# Altium PCB ESP_3_ERC.PcbDoc
Units mm, origin at the board's own origin, x right, y up, seen from the top; angles counter-clockwise.
Board outline 70 x 102 mm, 2 copper layers (Top Layer, Bottom Layer); 40 components, 42 nets, 143 pads, 0 vias.
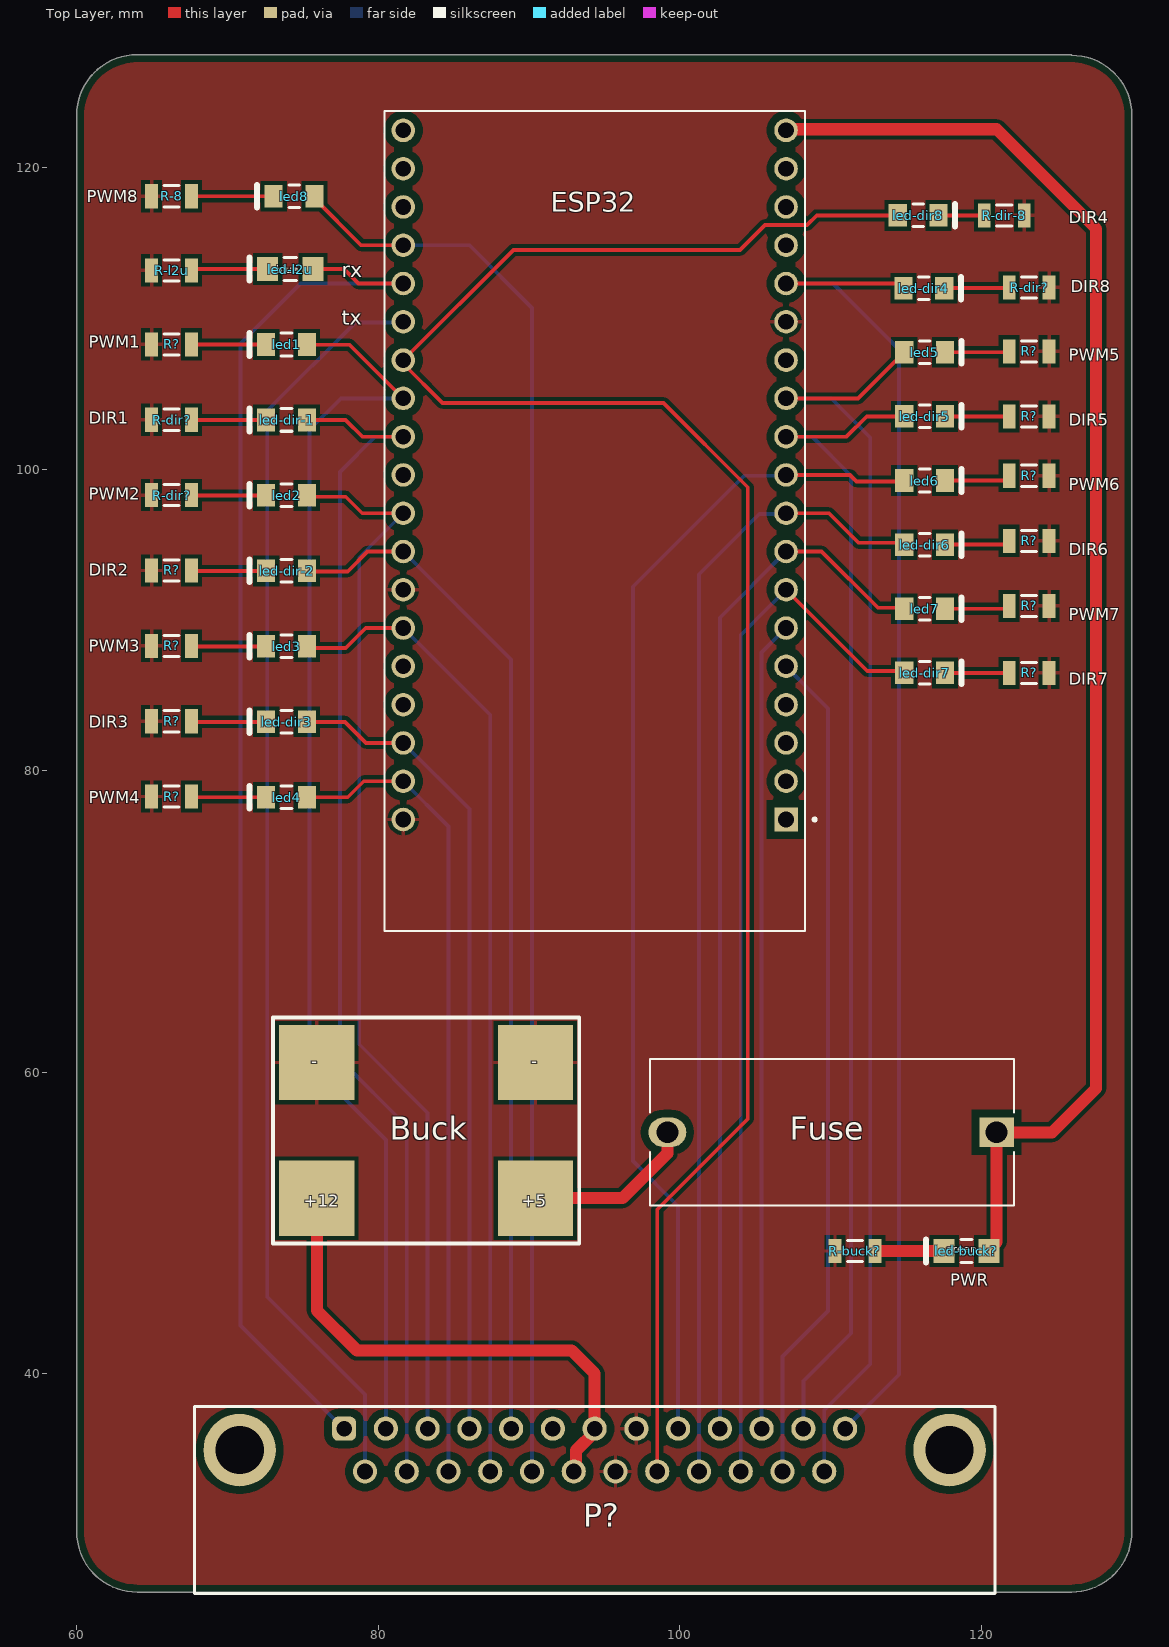
[diagram p0: Top Layer view]
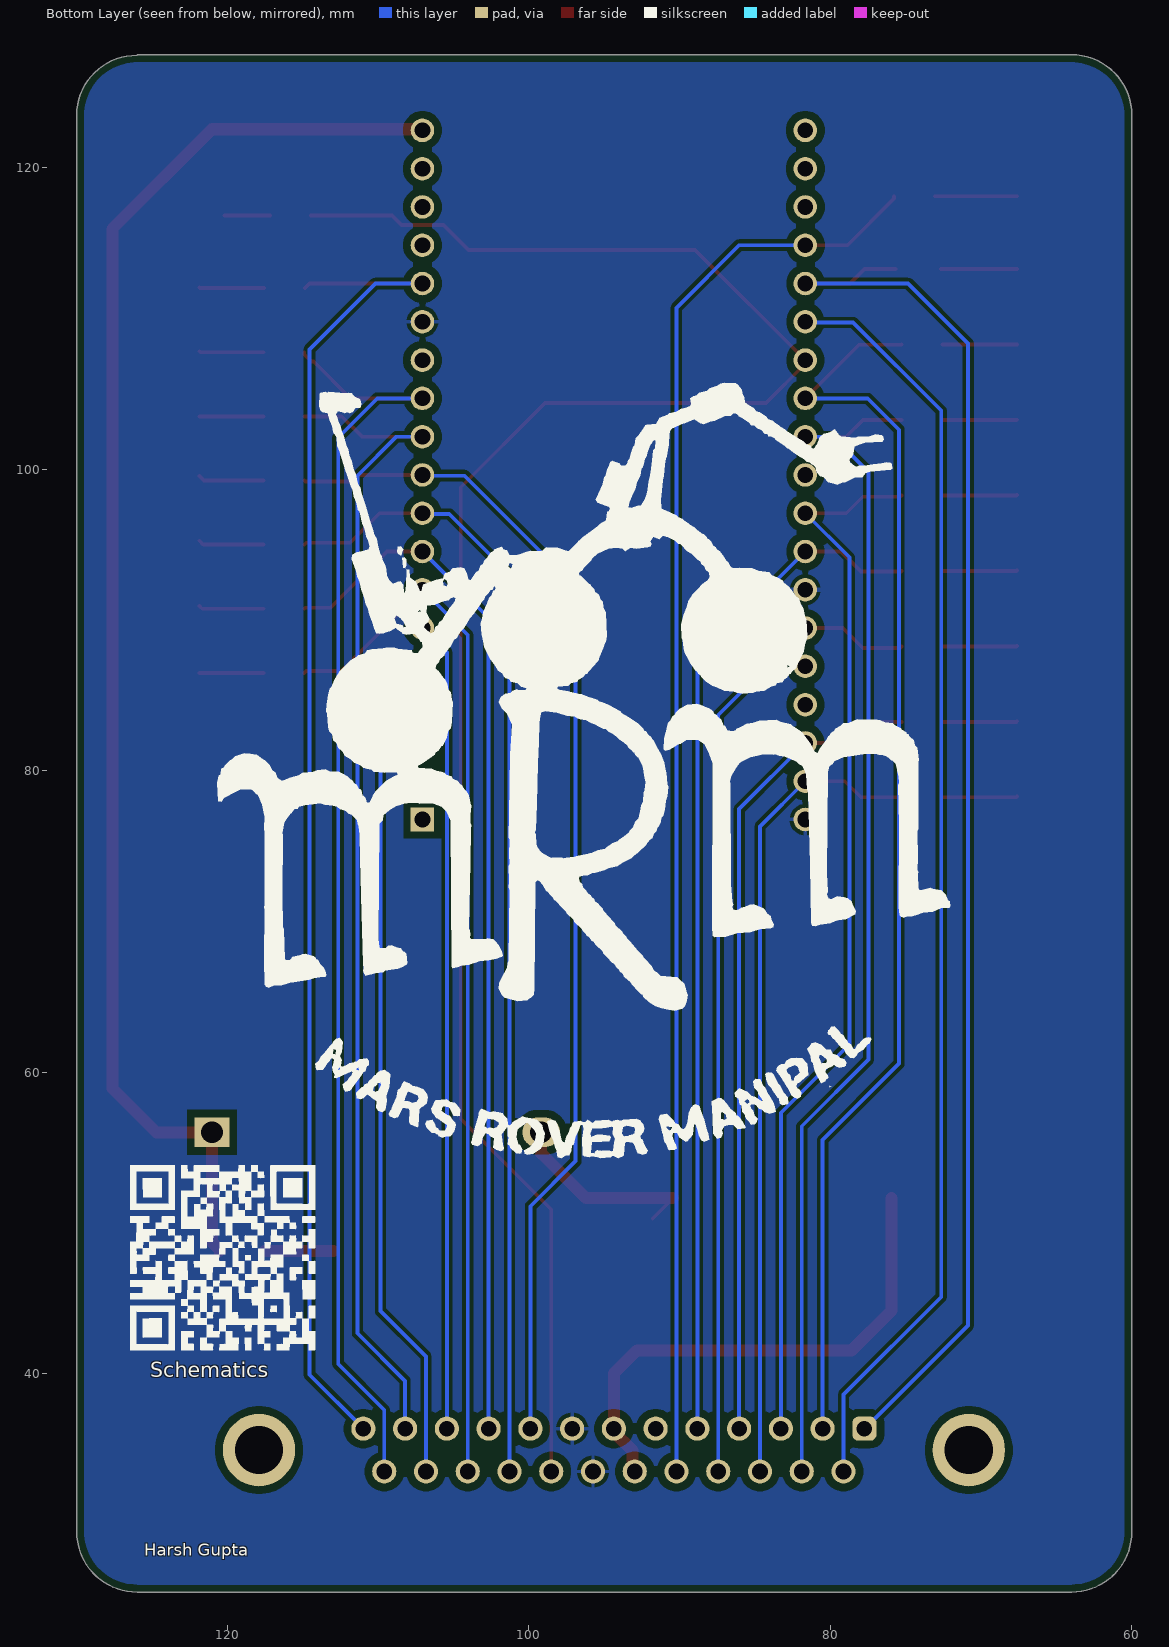
[diagram p1: Bottom Layer view, seen from below]

## Layer stack, top to bottom
Top Solder: solder mask 0.0102, Solder Resist, Dk 3.5
Top Layer: signal copper 0.0356
Dielectric 1: dielectric 0.32, FR-4, Dk 4.8
Bottom Layer: signal copper 0.0356
Bottom Solder: solder mask 0.0102, Solder Resist, Dk 3.5

## Board outline
60,29.5 60,123.5 cw(c64,123.5) 64,127.5 126,127.5 126,127.461 cw(c126.02,123.48) 130,123.5 130,29.5 cw(c126,29.5) 126,25.5 64,25.5 cw(c64,29.5)

## Design rules (kind name [scope] priority, off if disabled: settings)
Clearance [All] p1: gap=0.254 ignorepadtopadclearanceinfootprint=FALSE except(0.5: THPad-Fill THPad-Poly THPad-Region)
PolygonConnect [All] p1: connectstyle=Relief reliefconductorwidth=0.254 reliefentries=4 polygonreliefangle="90 Angle" airgapwidth=0.254
RoutingVias [All] p1: holewidth=0.711 width=1.27 viastyle="Through Hole" minholewidth=0.711 minwidth=1.27 maxholewidth=0.711 maxwidth=1.27
SolderMaskExpansion [All] p1: expansion=0.102 istentingtop=FALSE
SupplyNets "Schematic Supply Nets" [InNet('GND')] p1: voltage=0.000
Width [All] p1: maxlimit=1 minlimit=0.254 preferedwidth=0.254
30 further rules are at their usual default settings.

## Classes and differential pairs
component class ESP-3-schematic: Buck Buck? ESP32 Fuse Fuse? led1 led2 led3 led4 led5 led6 led7 led8 led-buck? led-dir3 led-dir4 led-dir5 led-dir6 led-dir7 led-dir8 led-dir-1 led-dir-2 led-l2u P? R-8 R-buck? R-dir-8 R-dir? R-l2u R?

## Components (designator, comment, footprint, x,y, rotation, side; value= is the part's Value field where it differs from the comment)
Buck "Microbuck" "Micro buck" 83.185,56.134 r90 top
ESP32 "ESP32-DEVKITC-32D" MODULE_ESP32-DEVKITC-32D 94.361,96.52 r180 top
Fuse "4527" FUSE_4527 110.111,56.007 r180 top
led1 "SML-LX1206YC-TR" LUMX-SML-LX1206YC-TR_V 73.918,108.277 r180 top
led2 "SML-LX1206YC-TR" LUMX-SML-LX1206YC-TR_V 73.918,98.262 r180 top
led3 "SML-LX1206YC-TR" LUMX-SML-LX1206YC-TR_V 73.918,88.247 r180 top
led4 "SML-LX1206YC-TR" LUMX-SML-LX1206YC-TR_V 73.918,78.232 r180 top
led5 "SML-LX1206YC-TR" LUMX-SML-LX1206YC-TR_V 116.252,107.759 r0 top
led6 "SML-LX1206YC-TR" LUMX-SML-LX1206YC-TR_V 116.252,99.251 r0 top
led7 "SML-LX1206YC-TR" LUMX-SML-LX1206YC-TR_V 116.252,90.742 r0 top
led8 "SML-LX1206YC-TR" LUMX-SML-LX1206YC-TR_V 74.418,118.11 r180 top
led-buck? "597-3311-407F" DIAL-597-3311-407F_V 119.033,48.133 r180 top
led-dir3 "SML-LX1206YC-TR" LUMX-SML-LX1206YC-TR_V 73.918,83.239 r180 top
led-dir4 "SML-LX1206YC-TR" LUMX-SML-LX1206YC-TR_V 116.205,112.014 r0 top
led-dir5 "SML-LX1206YC-TR" LUMX-SML-LX1206YC-TR_V 116.252,103.505 r0 top
led-dir6 "SML-LX1206YC-TR" LUMX-SML-LX1206YC-TR_V 116.252,94.996 r0 top
led-dir7 "SML-LX1206YC-TR" LUMX-SML-LX1206YC-TR_V 116.252,86.487 r0 top
led-dir8 "SML-LX1206YC-TR" LUMX-SML-LX1206YC-TR_V 115.824,116.84 r0 top
led-dir-1 "SML-LX1206YC-TR" LUMX-SML-LX1206YC-TR_V 73.918,103.269 r180 top
led-dir-2 "SML-LX1206YC-TR" LUMX-SML-LX1206YC-TR_V 73.918,93.254 r180 top
led-l2u "PG1102W-TR" STEC-1102W_V 74.168,113.284 r180 top
P? "618025231221" 618025231221 94.361,31.623 r0 top
R-8 "RC1206FR-07120RL" RESC3116X65X40LL10T20 66.294,118.11 r180 top
R-buck? "RC1206FR-07120RL" RESC3116X65X40LL10T20 111.633,48.133 r180 top
R-dir-8 "RC1206FR-07120RL" RESC3116X65X40LL10T20 121.539,116.84 r0 top
R-dir? "RC1206FR-07120RL" RESC3116X65X40LL10T20 123.19,112.062 r0 top
R-dir? "RC1206FR-07120RL" RESC3116X65X40LL10T20 66.294,98.282 r180 top
R-dir? "RC1206FR-07120RL" RESC3116X65X40LL10T20 66.294,103.283 r180 top
R-l2u "RC1206FR-07120RL" RESC3116X65X40LL10T20 66.294,113.197 r0 top
R? "RC1206FR-07120RL" RESC3116X65X40LL10T20 123.19,103.505 r0 top
R? "RC1206FR-07120RL" RESC3116X65X40LL10T20 123.19,99.568 r0 top
R? "RC1206FR-07120RL" RESC3116X65X40LL10T20 66.294,78.28 r180 top
R? "RC1206FR-07120RL" RESC3116X65X40LL10T20 123.19,86.487 r0 top
R? "RC1206FR-07120RL" RESC3116X65X40LL10T20 66.294,88.281 r180 top
R? "RC1206FR-07120RL" RESC3116X65X40LL10T20 123.19,90.932 r0 top
R? "RC1206FR-07120RL" RESC3116X65X40LL10T20 123.19,107.823 r0 top
R? "RC1206FR-07120RL" RESC3116X65X40LL10T20 66.294,83.281 r180 top
R? "RC1206FR-07120RL" RESC3116X65X40LL10T20 66.294,108.283 r180 top
R? "RC1206FR-07120RL" RESC3116X65X40LL10T20 66.294,93.282 r180 top
R? "RC1206FR-07120RL" RESC3116X65X40LL10T20 123.19,95.25 r0 top

## Footprints (in the part's own frame and the unit in brackets; to place one, negate y for a bottom-side part, rotate by r counter-clockwise, add the part's x,y. Pads: shape width x height; smd on the part's side, far side on the other; paste and mask are expansions set on the pad)
618025231221 [mm] "25 pins, right angled, 8.08mm, with hex screw"
  rrect50% 1.6x1.6 hole 1.04: 1(-16.62,4.72)
  round 1.6 hole 1.04: 2(-13.85,4.72) 3(-11.08,4.72) 4(-8.31,4.72) 5(-5.54,4.72) 6(-2.77,4.72) 7(0,4.72) 8(2.77,4.72) 9(5.54,4.72) 10(8.31,4.72) 11(11.08,4.72) 12(13.85,4.72) 13(16.62,4.72) 14(-15.235,1.88) 15(-12.465,1.88) 16(-9.695,1.88) 17(-6.925,1.88) 18(-4.155,1.88) 19(-1.385,1.88) 20(1.385,1.88) 21(4.155,1.88) 22(6.925,1.88) 23(9.695,1.88) 24(12.465,1.88) 25(15.235,1.88)
  round 4.8 hole 3.2: M1(-23.55,3.3) M2(23.55,3.3)
  silkscreen extent -26.55,-6.2 26.55,6.2, body extent -26.55,-12.2 26.55,6.2, height 12.55
DIAL-597-3311-407F_V [mm] "SMD, 2-Leads, Body 1.5x3mm"
  rect 1.42x1.6 smd: 1(-1.49,0) 2(1.49,0)
  silkscreen extent -0.38,-0.75 2.7,0.75, body extent -1.5,-0.75 1.5,0.75, height 1.5
FUSE_4527 [mm]
  rect 2.3x1.98 hole 1.45: 1(-10.92,0)
  oval 2.5x1.98 hole 1.45: 2(10.92,0)
  silkscreen extent -12.08,-4.85 12.08,4.85
LUMX-SML-LX1206YC-TR_V [mm] "SMD, 2-Leads, Body 3.2x1.5mm"
  rect 1.2x1.5 smd: 1(-1.35,0) 2(1.35,0)
  silkscreen extent -0.35,-0.75 2.45,0.75, body extent -1.6,-0.75 1.6,0.75, height 1.25
"Micro buck" [mm]
  rect 5x5 smd: 1(-4.5,7.25) 2(4.5,7.25) 3(-4.5,-7.25) 4(4.5,-7.25)
  silkscreen extent -7.5,-10.16 7.5,10.16
MODULE_ESP32-DEVKITC-32D [mm]
  rect 1.56x1.56 / inner round 1.56 / far side rect 1.56x1.56 hole 1.04: J2-1(-12.7,19.76)
  round 1.56 hole 1.04: J2-2(-12.7,17.22) J2-3(-12.7,14.68) J2-4(-12.7,12.14) J2-5(-12.7,9.6) J2-6(-12.7,7.06) J2-7(-12.7,4.52) J2-8(-12.7,1.98) J2-9(-12.7,-0.56) J2-10(-12.7,-3.1) J2-11(-12.7,-5.64) J2-12(-12.7,-8.18) J2-13(-12.7,-10.72) J2-14(-12.7,-13.26) J2-15(-12.7,-15.8) J2-16(-12.7,-18.34) J2-17(-12.7,-20.88) J2-18(-12.7,-23.42) J2-19(-12.7,-25.96) J3-1(12.7,19.76) J3-2(12.7,17.22) J3-3(12.7,14.68) J3-4(12.7,12.14) J3-5(12.7,9.6) J3-6(12.7,7.06) J3-7(12.7,4.52) J3-8(12.7,1.98) J3-9(12.7,-0.56) J3-10(12.7,-3.1) J3-11(12.7,-5.64) J3-12(12.7,-8.18) J3-13(12.7,-10.72) J3-14(12.7,-13.26) J3-15(12.7,-15.8) J3-16(12.7,-18.34) J3-17(12.7,-20.88) J3-18(12.7,-23.42) J3-19(12.7,-25.96)
  silkscreen extent -14.7,-27.25 13.95,27.15, body extent -13.97,-27.9 13.97,27.2, height 6.69
RESC3116X65X40LL10T20 [mm] "Chip Resistor, 2-Leads, Body 3.10x1.60mm, IPC High Density"
  rect 0.85x1.6 smd: 1(-1.325,0) 2(1.325,0)
  silkscreen extent -0.5,-0.7 0.5,0.7, body extent -1.6,-0.85 1.6,0.85, height 0.65
STEC-1102W_V [mm] "SMD, 2-Leads, Body 3x1.5mm"
  rect 1.4x1.6 smd: 1(-1.5,0) 2(1.5,0)
  silkscreen extent -0.4,-0.75 2.7,0.75, body extent -1.5,-0.75 1.5,0.75, height 1.78

## Part data
Buck: library part microbuck
ESP32: "WiFi Development Tools (802.11) ESP32 General Development Kit, ESP32-WROOM-32D on the board", Package=None, Check_prices=https://www.snapeda.com/parts/ESP32-DEVKITC-32D/Espressif+Systems/view-part/?ref=eda, MF="Espressif Systems", MP=ESP32-DEVKITC-32D, SnapEDA_Link=https://www.snapeda.com/parts/ESP32-DEVKITC-32D/Espressif+Systems/view-part/?ref=snap
Fuse: "Fuseholder; 5 A; 250 V; Nylon; Base only; Brass, Tin Plate (Contact)", Package=None, Availability=Unavailable, MP=4527, Price=None
led1 led2 led3 led4 led5 led6 led7 led8 led-dir3 led-dir4 led-dir5 led-dir6 led-dir7 led-dir8 led-dir-1 led-dir-2: library part CMP-2000-07124-1, "Yellow LED, Water Clear Len, 585 nm, 2.1 V, -40 to 85 degC, 2-Pin SMD, RoHS, Tape and Reel", Color=Yellow, Current - Test=20mA, Lens Color=Colorless, Manufacturer=Lumex, Millicandela Rating=6mcd, Package / Case=1206(3216Metric), Package Description="2-Pin Surface Mount Device, Body 3.2 x 1.5 mm", Standard Package=3,000, Supplier Device Package=1206, Voltage - Forward (Vf) (Typ)=2.1V, Catalog Drawings=SML-LX1206SeriesTopSML-LX1206SeriesSideSML-LX1206SeriesBottomSML-LX1206SeriesFootprint, Category=Optoelectronics, Datasheet URL=http://www.lumex.com/content/files/ProductAttachment/SML-LX1206YC-TR.pdf, Datasheet Version="Rev. K, 08/2012", Family=LEDIndication-Discrete, Features=-, Height (Max)=1.10mm, Lens Style/Size=RectanglewithFlatTop, Lens Transparency=Clear, Manufacturer URL=http://www.lumexinstruments.com/, Mounting Technology=SurfaceMount, Mounting Type=SurfaceMount, Online Catalog=SML-LX1206RectanglewithFlatTop1206PackageLEDs, Other Names=67-1358-2LU60357TRSMLLX1206YCTR, Package Reference=SML-LX1206YC-TR, Packaging=Tape&Reel(TR), Product Training Modules=LEDsBenefitsofCustomLEDandLCDTechnology, RoHS Information=RoHSCertofCompliance, Series=-, Size / Dimension=3.20mmLx1.60mmW, Viewing Angle=160°, Wavelength - Dominant=-, Wavelength - Peak=585nm
led-buck?: library part CMP-2000-05651-1, "LED Green, 75 mW, 30 mA, -30 to 85 degC, 2-Pin SMD, RoHS, Tape and Reel", Emitting Color=YellowGreen, Forward Current=30mA, Forward Voltage=2.5V, Manufacturer=Dialight, Operating Temp Range=-30Cto85C, Operating Temperature Classification=Commercial, Package Description="2-Pin Surface Mount Device, Body 1.5 x 3 mm", Package Type=SMD, Power Dissipation=75W, Reverse Voltage=4V, Test Current (It)=20mA, Chip Material=GaP, Datasheet URL=https://datasheet.ciiva.com/15117/getdatasheetpartid-142484-15117764.pdf, Datasheet Version=07/2002, DELETED=Compliant, High Brightness=No, Lens Dimensions=2x1.5x0.9mm, Lens Type=NonDiffused, Lum Intensity=7.5mcd, Luminous Intensity=7.5mcd, Main Category=ChipLED, Manufacturer URL=http://www.dialight.com/, Mounting=SurfaceMount, Mounting Technology=SurfaceMount, Number of  Elements=1, Package Reference=597-3311-407F, Packaging=TapeandReel, Peak Wavelength=560nm, Pin Count=2, Product Depth (mm)=1.5mm, Product Height (mm)=1.5mm, Product Length (mm)=3mm, Rad Hardened=No, Shape Type=Rectangular, Type=Uni-Color, Viewing Angle=70deg
led-l2u: library part CMP-2000-06890-1, "Green LED, 567 nm, 2.1 V, 30 mA, -30 to 85 degC, 2-Pin SMD, RoHS, Tape and Reel", Emitting Color=YellowGreen, Forward Current=30mA, Forward Voltage=2.5V, Manufacturer="Stanley Electric", Operating Temp Range=-30Cto85C, Operating Temperature Classification=Commercial, Package Description="2-Pin Surface Mounted Device , Body 3 x 1.5 mm", Package Reference=1102W, Package Type=SMD, Power Dissipation=75W, Reverse Voltage=4V, Test Current (It)=20mA, Chip Material=GaP, Datasheet URL=http://media.digikey.com/pdf/Data%20Sheets/Stanley%20Electric%20PDFs/1102W_Series.pdf, Datasheet Version=08/2007, DELETED=Compliant, Dominant Wave Length=567nm, High Brightness=No, Lens Dimensions=2x1.5x0.9mm, Lum Intensity=12mcd, Luminous Intensity=12mcd, Main Category=ChipLED, Manufacturer URL=http://www.stanley-electric.com/, Mounting=SurfaceMount, Mounting Technology=SurfaceMount, Number of  Elements=1, Packaging=TapeandReel, Peak Wavelength=560nm, Pin Count=2, Product Depth (mm)=1.5mm, Product Height (mm)=1.5mm, Product Length (mm)=3mm, Rad Hardened=No, Shape Type=Rectangular, Type=Uni-Color, Viewing Angle=69/85deg
P?: library part CMP-1502-00286-2, Contact Resistance=30mΩ, Current Rating=3A, Insulation Resistance=5GΩ, Max Operating Temperature=105°C, Min Operating Temperature=-55°C, Operating Supply Voltage=125V, Contact Plating=Gold, Depth=18.5mm, Gender=Male, Housing Material=Steel, Insulation Material=PBT, Length=53.1mm, Mount="Through Hole", NexarPartId=18818208, Number of Contacts=25, Number of Pins=25, Number of Rows=2, Orientation="Right Angle", Pitch=2.77mm, REACH SVHC=Unknown, RoHS=Compliant, Termination=SMD/SMT, Voltage Rating=125V, Width=12.5mm
R-8 R-buck? R-dir-8 R-dir? R-dir? R-dir? R-l2u R? R? R? R? R? R? R? R? R? R? R?: library part CMP-2000-06965-1, "Chip Resistor, 120 Ohm, +/- 1%, 250 mW, -55 to 155 degC, 1206 (3216 Metric), RoHS, Tape and Reel", Manufacturer=Yageo, Package Description="2-Pin Surface Mount Device, Body 3.1 x 1.6 mm", Package Reference=1206, Power Rating=250mW, Resistance=120ohm, Resistance Tolerance=±1%, Resistor Case Style=1206[3216Metric], Resistor Element Type=ThickFilm, Temperature Coefficient=±100ppm/°C, Voltage Rating=200V, Datasheet URL=http://www.yageo.com/documents/recent/PYu-RC_Group_51_RoHS_L_7.pdf, Datasheet Version="Rev. 7, 05/2017", Manufacturer URL=http://www.yageo.com/, Mounting Technology=SurfaceMount, MSL=MSL1-Unlimited, Packaging=CutTape, Product Range=RCSeries, SVHC=ToBeAdvised

## Nets (pads, with @x,y where several pads share a name; then routed paths per layer and width w, separated by ;. In a path a pad name is that pad's centre, name@x,y a point inside that pad or via, vN(x,y) a via of type N, cw(c..) or ccw(c..) an arc to the next point about the centre after c; other vN are vias at no path point)
GND: Buck.2 Buck.4 ESP32.J2-14 ESP32.J3-1 ESP32.J3-7 P?.8 P?.20 R-8.2 R-buck?.2 R-dir-8.2 R-dir?.2 R-l2u.1 R?.2 | length 0.3
  Top Layer w1: P?.20 P?.20@95.746,33.665 ; P?.8@97.016,36.228 P?.8
NetBuck_1: Buck.1 P?.7 P?.19 | length 34.7
  Top Layer w0.8: Buck.1 75.935,44.185 78.591,41.529 92.837,41.529 94.361,40.005 P?.7 94.361,36.127 93.129,34.895 93.129,33.656 P?.19
NetBuck_3: Buck.3 Fuse.2 | length 13.3
  Top Layer w0.254: Buck.3 Buck.3@91.787,50.282
  Top Layer w0.8: Buck.3 96.211,51.634 99.191,54.614 Fuse.2
NetESP32_J2-5: ESP32.J2-5 P?.24 | length 55.8
  Bottom Layer w0.254: P?.24 106.826,41.129 109.855,44.158 109.855,84.126 ESP32.J2-5
NetESP32_J2-6: ESP32.J2-6 P?.11 | length 53.8
  Bottom Layer w0.254: P?.11 105.441,87.84 ESP32.J2-6
NetESP32_J2-7: ESP32.J2-7 led-dir7.1 P?.23 | length 69.9
  Top Layer w0.254: ESP32.J2-7 112.447,86.614 114.775,86.614 led-dir7.1
  Bottom Layer w0.254: P?.23 104.056,88.995 ESP32.J2-7
NetESP32_J2-8: ESP32.J2-8 led7.1 P?.10 | length 69.4
  Top Layer w0.254: ESP32.J2-8 109.422,94.54 113.157,90.805 114.839,90.805 led7.1
  Bottom Layer w0.254: P?.10 102.671,90.15 ESP32.J2-8
NetESP32_J2-9: ESP32.J2-9 led-dir6.1 P?.22 | length 75.7
  Top Layer w0.254: ESP32.J2-9 109.907,97.08 111.864,95.123 114.775,95.123 led-dir6.1
  Bottom Layer w0.254: P?.22 101.286,93.031 105.283,97.028 107.009,97.028 ESP32.J2-9
NetESP32_J2-10: ESP32.J2-10 led6.1 P?.9 | length 78.4
  Top Layer w0.254: ESP32.J2-10 111.304,99.62 111.737,99.187 114.839,99.187 led6.1
  Bottom Layer w0.254: P?.9 99.901,51.102 96.901,54.102 96.901,92.202 104.267,99.568 107.009,99.568 ESP32.J2-10
NetESP32_J2-11: ESP32.J2-11 led-dir5.1 P?.12 | length 78.3
  Top Layer w0.254: ESP32.J2-11 111.073,102.16 112.418,103.505 led-dir5.1
  Bottom Layer w0.254: ESP32.J2-11 108.787,102.16 111.379,99.568 111.379,42.672 108.211,39.504 P?.12
NetESP32_J2-12: ESP32.J2-12 led5.1 P?.25 | length 85.7
  Top Layer w0.254: ESP32.J2-12 111.842,104.7 114.279,107.136 114.429,107.136 114.902,107.61 led5.1
  Bottom Layer w0.254: ESP32.J2-12 110.057,104.7 112.649,102.108 112.649,40.64 109.596,37.587 P?.25
NetESP32_J2-15: ESP32.J2-15 led-dir4.1 P?.13 | length 90.3
  Top Layer w0.254: ESP32.J2-15 114.549,112.32 led-dir4.1
  Bottom Layer w0.254: ESP32.J2-15 110.184,112.32 114.554,107.95 114.554,39.916 P?.13 P?.13@111.019,36.343
NetESP32_J2-19: ESP32.J2-19 Fuse.1 led-buck?.1 | length 96.3
  Top Layer w0.8: ESP32.J2-19 107.136,122.555 121.031,122.555 127.635,115.951 127.635,58.928 124.714,56.007 Fuse.1 121.031,48.731 120.523,48.223 led-buck?.1
NetESP32_J3-2: ESP32.J3-2 led4.1 P?.16 | length 53.9
  Top Layer w0.254: led4.1 77.978,78.232 79.046,79.3 ESP32.J3-2
  Bottom Layer w0.254: ESP32.J3-2 84.666,76.295 P?.16
NetESP32_J3-3: ESP32.J3-3 led-dir3.1 P?.4 | length 54.3
  Top Layer w0.254: led-dir3.1 77.797,83.239 79.196,81.84 ESP32.J3-3
  Bottom Layer w0.254: ESP32.J3-3 86.051,77.45 P?.4
NetESP32_J3-6: ESP32.J3-6 led3.1 P?.17 | length 65.3
  Top Layer w0.254: led3.1 75.377,88.138 77.851,88.138 79.173,89.46 ESP32.J3-6
  Bottom Layer w0.254: ESP32.J3-6 87.436,83.685 P?.17
NetESP32_J3-8: ESP32.J3-8 led-dir-2.1 P?.5 | length 68.1
  Top Layer w0.254: led-dir-2.1 75.304,93.218 77.978,93.218 79.3,94.54 ESP32.J3-8
  Bottom Layer w0.254: ESP32.J3-8 88.821,87.38 P?.5
NetESP32_J3-9: ESP32.J3-9 led2.1 P?.3 | length 70.7
  Top Layer w0.254: led2.1 75.359,98.171 77.851,98.171 78.942,97.08 ESP32.J3-9
  Bottom Layer w0.254: ESP32.J3-9 78.74,94.159 78.74,61.849 83.281,57.308 P?.3
NetESP32_J3-11: ESP32.J3-11 led-dir-1.1 P?.15 | length 80.2
  Top Layer w0.254: led-dir-1.1 77.833,103.269 78.942,102.16 ESP32.J3-11
  Bottom Layer w0.254: ESP32.J3-11 79.808,102.16 77.47,99.822 77.47,60.833 81.896,56.407 P?.15
NetESP32_J3-12: ESP32.J3-12 led1.1 P?.2 | length 83.3
  Top Layer w0.254: led1.1 75.289,108.256 78.105,108.256 ESP32.J3-12
  Bottom Layer w0.254: P?.2 80.511,55.506 75.438,60.579 75.438,102.616 77.522,104.7 ESP32.J3-12
NetESP32_J3-13: ESP32.J3-13 led-dir8.1 P?.21 | length 131.1
  Top Layer w0.254: P?.21 98.516,50.891 104.521,56.896 104.521,98.806 98.933,104.394 84.269,104.394 81.661,107.002 ESP32.J3-13 88.975,114.554 104.013,114.554 105.664,116.205 108.458,116.205 109.093,116.84 led-dir8.1
NetESP32_J3-14: ESP32.J3-14 P?.14 | length 84.5
  Bottom Layer w0.254: P?.14 79.126,38.603 72.644,45.085 72.644,103.886 78.486,109.728 81.609,109.728 ESP32.J3-14
NetESP32_J3-15: ESP32.J3-15 led-l2u.1 P?.1 | length 93.7
  Top Layer w0.254: led-l2u.1 77.724,113.284 78.688,112.32 ESP32.J3-15
  Bottom Layer w0.254: P?.1 77.703,36.343 70.866,43.18 70.866,108.331 74.855,112.32 ESP32.J3-15
NetESP32_J3-16: ESP32.J3-16 led8.1 P?.18 | length 94.8
  Top Layer w0.254: led8.1 75.768,117.96 78.868,114.86 ESP32.J3-16
  Bottom Layer w0.254: ESP32.J3-16 86.054,114.86 90.206,110.708 P?.18
Netled1_2: led1.2 R?.1@67.619,108.283 | length 5
  Top Layer w0.254: R?.1@67.619,108.283 67.626,108.277 led1.2
Netled2_2: led2.2 R-dir?.1@67.619,98.282 | length 5
  Top Layer w0.254: R-dir?.1@67.619,98.282 67.64,98.262 led2.2
Netled3_2: led3.2 R?.1@67.619,88.281 | length 5
  Top Layer w0.254: R?.1@67.619,88.281 67.654,88.247 led3.2
Netled4_2: led4.2 R?.1@67.619,78.28 | length 5
  Top Layer w0.254: R?.1@67.619,78.28 67.667,78.232 led4.2
Netled5_2: led5.2 R?.1@121.865,107.823 | length 4.3
  Top Layer w0.254: led5.2 121.801,107.759 R?.1@121.865,107.823
Netled6_2: led6.2 R?.1@121.865,99.568 | length 4.4
  Top Layer w0.254: led6.2 121.567,99.251 121.865,99.549 R?.1@121.865,99.568
Netled7_2: led7.2 R?.1@121.865,90.932 | length 4.3
  Top Layer w0.254: led7.2 121.674,90.742 R?.1@121.865,90.932
Netled8_2: led8.2 R-8.1 | length 5.4
  Top Layer w0.254: R-8.1 led8.2
Netled-buck?_2: led-buck?.2 R-buck?.1 | length 4.6
  Top Layer w0.8: R-buck?.1 led-buck?.2
Netled-dir3_2: led-dir3.2 R?.1@67.619,83.281 | length 5
  Top Layer w0.254: R?.1@67.619,83.281 67.66,83.239 led-dir3.2
Netled-dir4_2: led-dir4.2 R-dir?.1@121.865,112.062 | length 4.3
  Top Layer w0.254: led-dir4.2 121.817,112.014 R-dir?.1@121.865,112.062
Netled-dir5_2: led-dir5.2 R?.1@121.865,103.505 | length 4.3
  Top Layer w0.254: led-dir5.2 R?.1@121.865,103.505
Netled-dir6_2: led-dir6.2 R?.1@121.865,95.25 | length 4.4
  Top Layer w0.254: led-dir6.2 121.611,94.996 R?.1@121.865,95.25
Netled-dir7_2: led-dir7.2 R?.1@121.865,86.487 | length 4.3
  Top Layer w0.254: led-dir7.2 R?.1@121.865,86.487
Netled-dir8_2: led-dir8.2 R-dir-8.1 | length 3
  Top Layer w0.254: led-dir8.2 R-dir-8.1
Netled-dir-1_2: led-dir-1.2 R-dir?.1@67.619,103.283 | length 5
  Top Layer w0.254: R-dir?.1@67.619,103.283 67.633,103.269 led-dir-1.2
Netled-dir-2_2: led-dir-2.2 R?.1@67.619,93.282 | length 5
  Top Layer w0.254: R?.1@67.619,93.282 67.647,93.254 led-dir-2.2
Netled-l2u_2: led-l2u.2 R-l2u.2 | length 5
  Top Layer w0.254: R-l2u.2@67.619,113.284 led-l2u.2
pads on no net: ESP32.J2-1 ESP32.J2-2 ESP32.J2-3 ESP32.J2-4 ESP32.J2-13 ESP32.J2-16 ESP32.J2-17 ESP32.J2-18 ESP32.J3-4 ESP32.J3-5 ESP32.J3-10 ESP32.J3-17 ESP32.J3-18 ESP32.J3-19 P?.6 P?.M1 P?.M2

## Polygon pours and split planes (outlines as drawn)
GND on Bottom Layer "GND_L02_P003" (solid, pour order 3): 60.5,127 129.5,127 129.5,26 60.5,26
GND on Top Layer "GND_L01_P000" (solid, pour order 0): 60.5,127 129.5,127 129.5,26 60.5,26

## Other copper
Top Layer:
  pour cut-out: 60,123.5 60.5,123.5 cw(c64,123.5) 64,127 64,127.5 60.04,127.5 60,127.46
  pour cut-out: 60,25.54 60.04,25.5 64,25.5 64,26 cw(c64,29.5) 60.5,29.5 60,29.5
  pour cut-out: 126,25.5 129.96,25.5 130,25.54 130,29.5 129.5,29.5 cw(c126,29.5) 126,26
  pour cut-out: 126,127 cw(c126,123.5) 129.5,123.5 130,123.5 130,127.46 129.96,127.5 126,127.5
Bottom Layer:
  pour cut-out: 126,127 cw(c126,123.5) 129.5,123.5 130,123.5 130,127.46 129.96,127.5 126,127.5
  pour cut-out: 126,25.5 129.96,25.5 130,25.54 130,29.5 129.5,29.5 cw(c126,29.5) 126,26
  pour cut-out: 60,25.54 60.04,25.5 64,25.5 64,26 cw(c64,29.5) 60.5,29.5 60,29.5
  pour cut-out: 60,123.5 60.5,123.5 cw(c64,123.5) 64,127 64,127.5 60.04,127.5 60,127.46

## Silkscreen, mask and mechanical layers (free items; w line width, h text height)
Top Overlay:
  text "PWM8" at 60.679,117.702 h0.8
  text "DIR4" at 125.83,116.305 h0.8
  text "blue" at 73.252,113.003 h0.5
  text "rx" at 77.57,112.749 h1
  text "DIR8" at 125.957,111.733 h0.8
  text "tx" at 77.57,109.574 h1
  text "PWM1" at 60.806,108.05 h0.8
  text "PWM5" at 125.83,107.182 h0.8
  text "DIR1" at 60.806,103.012 h0.8
  text "DIR5" at 125.83,102.885 h0.8
  text "PWM6" at 125.83,98.588 h0.8
  text "PWM2" at 60.806,97.975 h0.8
  text "DIR6" at 125.83,94.292 h0.8
  text "DIR2" at 60.806,92.937 h0.8
  text "PWM7" at 125.83,89.995 h0.8
  text "PWM3" at 60.806,87.899 h0.8
  text "DIR7" at 125.83,85.698 h0.8
  text "DIR3" at 60.806,82.862 h0.8
  text "PWM4" at 60.806,77.824 h0.8
  text "-" at 75.565,60.306 h0.8
  text "-" at 90.17,60.306 h0.8
  text "+12" at 75.057,51.054 h0.8
  text "+5" at 89.535,51.054 h0.8
  text "green" at 117.702,48.019 h0.5
  text "PWR" at 117.956,45.82 h0.8
Bottom Overlay:
  drawing of 42 lines, arcs and shapes, not listed
  text "Schematics" at 125.107,39.739 h1
  text "Harsh Gupta" at 125.53,27.899 h0.8
Bottom Designator:
  drawing of 18 lines, arcs and shapes, not listed
  text "Harsh Gupta" at 126.6,28.078 h1.5

## Text inside footprints (layer, text, board x,y; h text height)
P?: Top Courtyard "PCB Edge" at 90.961,23.803 h1.02